# EAGLE board mainboard_transmitter.vf0.1 (EAGLE 7.1.0)
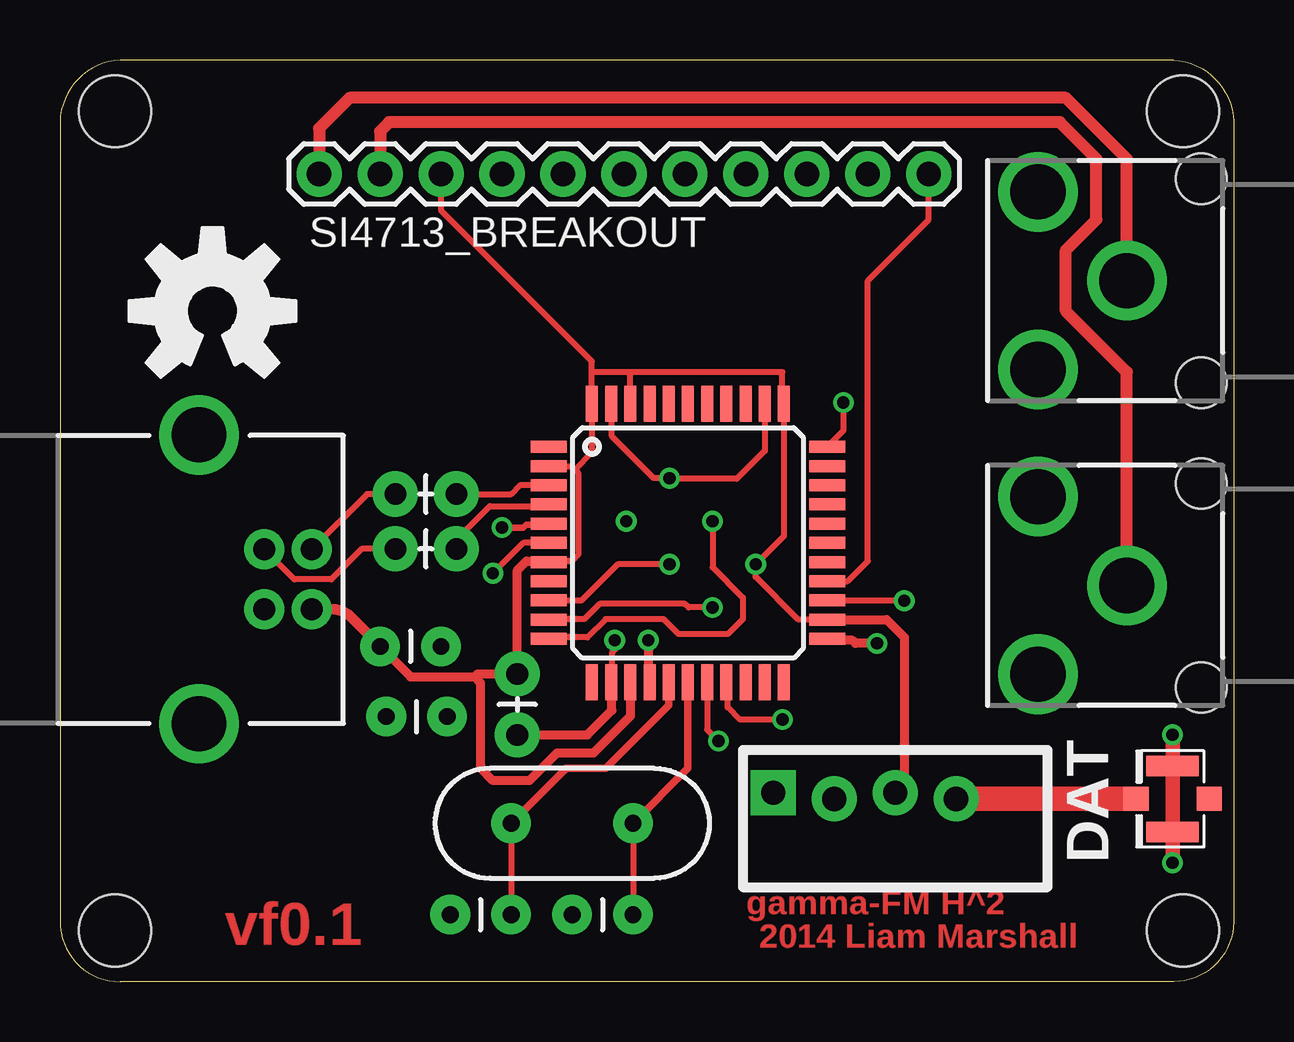
[diagram p0: board, top side]
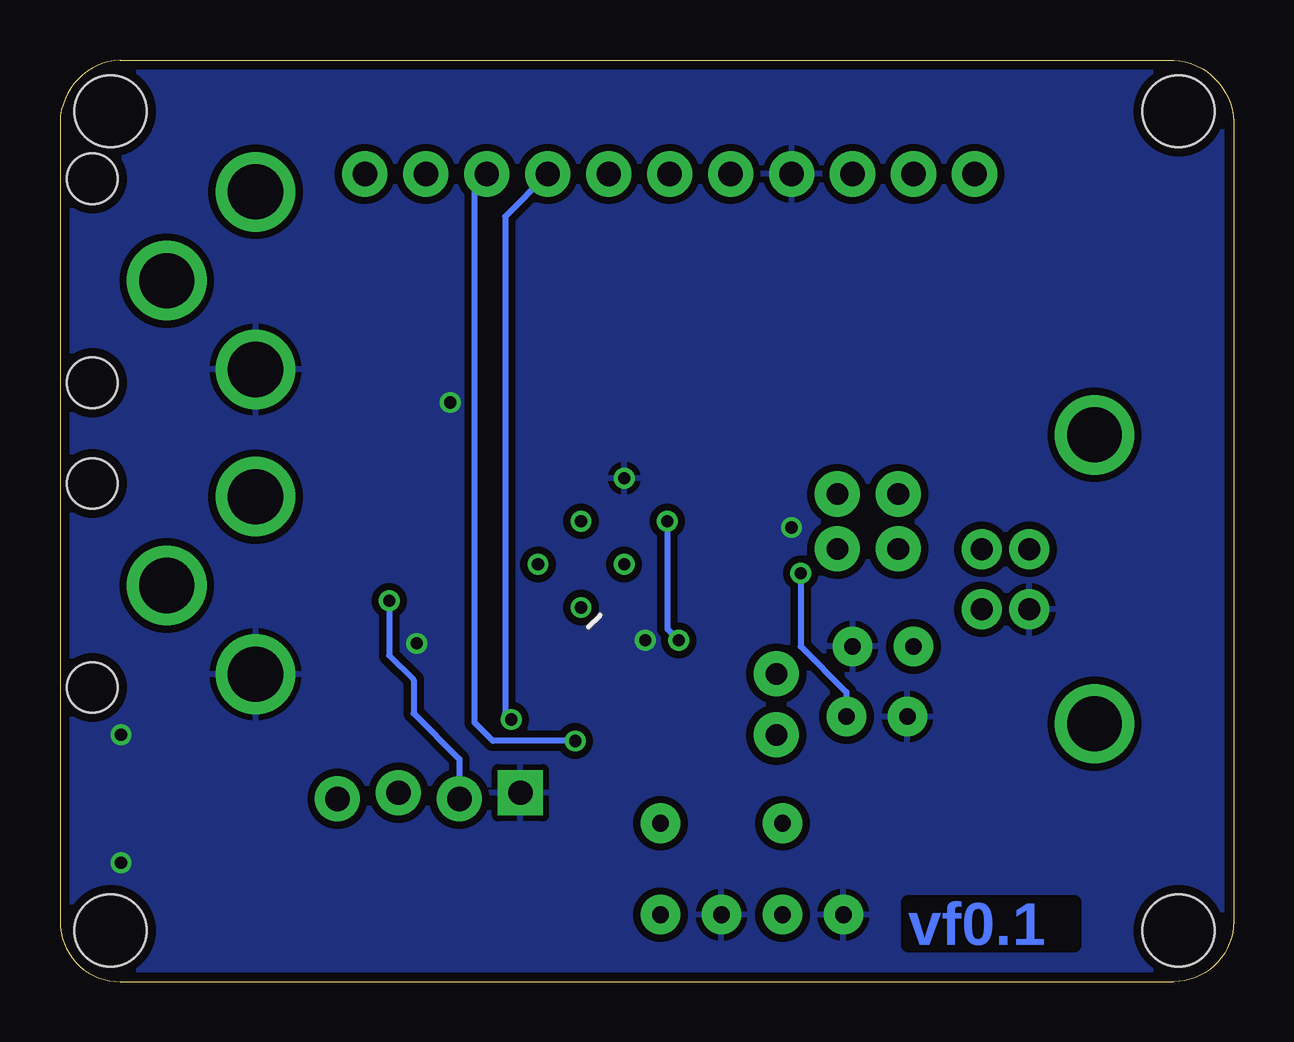
[diagram p1: board, bottom side, seen from below]

Size 48.9 x 38.4 mm. Coordinates in mm from the lower left corner, seen from the top.
Outline: 46.4,38.41 2.5,38.41 arc90 0,35.6 0,2.5 arc90 2.5,0 46.4,0 arc90 48.9,2.5 48.9,35.6 arc90 46.4,38.41
Copper layers (1*16): Top 0.0356mm / dielectric 1.5011mm / Bottom 0.0356mm
Design rules "LaenPCBOrder": minimum track width 6mil, minimum drill 13mil, track to track 6mil, track to pad 6mil, pad to pad 6mil, via to via 6mil, smd to smd 6mil, copper to edge 15mil, drill to drill 6mil, minimum pad ring 7mil, minimum via ring 7mil, stop-mask expansion 3mil, vias tented up to drill 0mil, thermal gap 10mil
Holes 3 mm at 2.29,2.13 46.79,2.13 46.79,36.27 2.29,36.27

## Footprints (pad centres in the part's own frame; a part is rotated, then mirrored left to right if it is on the bottom)
CAP-PTH-SMALL = drill 0.7 pad 1.651: 1 0,0; 2 2.54,0
2X3_TEST_POINTS = drill 0.508: 1 -2.54,-1.27; 2 -2.54,1.27; 3 0,-1.27; 4 0,1.27; 5 2.54,-1.27; 6 2.54,1.27
U.FL = smd 2.2 x 0.85: P$1 0,1.375; P$2 0,-1.375 | smd 1.05 x 1: P$3 1.525,0; P$4 -1.525,0
USB-B-PTH = drill 0.914 pad 1.676: D+ 0,1.25; D- 1.981,1.25; GND 0,-1.25; VBUS 1.981,-1.25 | drill 2.286: S1 -2.718,-6.02; S2 -2.718,6.02
RCA = drill 2.3: PIN 3.7,3.7; SHELL 0,0; SWITCH 3.7,-3.7 | hole 2.1: -3.1,4.25; -3.1,-4.25
AXIAL-0.1 = drill 0.9 pad 1.88: P$1 0,0; P$2 2.54,0
1X11 = drill 1.016 pad 1.88: 1 0,0; 2 2.54,0; 3 5.08,0; 4 7.62,0; 5 10.16,0; 6 12.7,0; 7 15.24,0; 8 17.78,0; 9 20.32,0; 10 22.86,0; 11 25.4,0
TQFP44 = smd 1.5 x 0.5: 1 -5.8,4; 2 -5.8,3.2; 3 -5.8,2.4; 4 -5.8,1.6; 5 -5.8,0.8; 6 -5.8,0; 7 -5.8,-0.8; 8 -5.8,-1.6; 9 -5.8,-2.4; 10 -5.8,-3.2; 11 -5.8,-4; 23 5.8,-4; 24 5.8,-3.2; 25 5.8,-2.4; 26 5.8,-1.6; 27 5.8,-0.8; 28 5.8,0; 29 5.8,0.8; 30 5.8,1.6; 31 5.8,2.4; 32 5.8,3.2; 33 5.8,4 | smd 0.5 x 1.5: 12 -4,-5.8; 13 -3.2,-5.8; 14 -2.4,-5.8; 15 -1.6,-5.8; 16 -0.8,-5.8; 17 0,-5.8; 18 0.8,-5.8; 19 1.6,-5.8; 20 2.4,-5.8; 21 3.2,-5.8; 22 4,-5.8; 34 4,5.8; 35 3.2,5.8; 36 2.4,5.8; 37 1.6,5.8; 38 0.8,5.8; 39 0,5.8; 40 -0.8,5.8; 41 -1.6,5.8; 42 -2.4,5.8; 43 -3.2,5.8; 44 -4,5.8
RF-LINK_TX = drill 1.016 pad 1.88: ANT 7.62,-0.127; DATA 2.54,-0.127; VCC 5.08,0.127 | drill 1.016 pad 1.88 square: GND 0,0.127
HC49US = drill 0.7 pad 1.651: 1 -2.54,0; 2 2.54,0

## Placement (x,y rotation side)
C1  1uF  [CAP-PTH-SMALL]  16.13,11.05 180 top
C2  22pF  [CAP-PTH-SMALL]  21.34,2.79 0 top
C3  22pF  [CAP-PTH-SMALL]  16.26,2.79 0 top
C4  1uF  [CAP-PTH-SMALL]  13.34,13.97 0 top
J1  AVR_SPI_PRG_6TESTPOINTS  [2X3_TEST_POINTS]  26.29,18.29 45 bottom
J2  U.FL  [U.FL]  46.36,7.62 180 top
JP1  USB-B  [USB-B-PTH]  8.51,16.76 0 top
L  RCA  [RCA]  44.45,16.51 180 top
R  RCA  [RCA]  44.45,29.21 180 top
R1  22  [AXIAL-0.1]  13.97,20.32 0 top
R2  22  [AXIAL-0.1]  13.97,18.03 0 top
R3  10k  [AXIAL-0.1]  19.05,10.29 90 top
SI4713_BREAKOUT  M11PTH  [1X11]  10.8,33.66 0 top
U$1  ATMEGA32U4TQFP-44  [TQFP44]  26.16,18.29 0 top
U$2  RF-LINK_TX  [RF-LINK_TX]  29.72,7.75 0 top
U$3  [OSHW-LOGO-L]  6.35,27.94 0 top
Y1  16MHz  [HC49US]  21.34,6.6 0 top

## Library data of the parts
C1-C4 = SparkFun-Capacitors
J1 L R SI4713_BREAKOUT = SparkFun-Connectors
J2 = SparkFun-Connectors; PROD_ID: CONN-09193
JP1 = SparkFun-Connectors; PROD_ID: CONN-08278
R1 R2 = SparkFun-Resistors
R3 = SparkFun-Resistors; PROD_ID: RES-9435
U$1 = SparkFun-DigitalIC
U$2 = SparkFun-RF
U$3 = SparkFun-Aesthetics
Y1 = SparkFun-FreqCtrl

## Nets
!RESET: J1.5 R3.P$1 U$1.13
GND: C1.2 C2.1 C3.1 C4.2 J1.6 J2.P$1 J2.P$2 JP1.GND L.PIN R.PIN SI4713_BREAKOUT.4 U$1.5 U$1.15 U$1.23 U$1.33 U$1.35 U$1.43 U$2.GND
L: L.SHELL SI4713_BREAKOUT.2
MISO: J1.1 U$1.10
MOSI: J1.4 U$1.11
N$1: JP1.D+ R2.P$1
N$2: JP1.D- R1.P$1
N$3: R1.P$2 U$1.3
N$4: R2.P$2 U$1.4
N$5: C1.1 U$1.6
N$6: C2.2 U$1.17 Y1.2
N$7: C3.2 U$1.16 Y1.1
N$9: J2.P$3 U$2.ANT
R: R.SHELL SI4713_BREAKOUT.1
RADIODAT: U$1.25 U$2.DATA
SCK: J1.3 U$1.9
SCL: SI4713_BREAKOUT.9 U$1.18
SDA: SI4713_BREAKOUT.8 U$1.19
T_RST: SI4713_BREAKOUT.11 U$1.26
VCC: C4.1 J1.2 JP1.VBUS R3.P$2 SI4713_BREAKOUT.3 U$1.2 U$1.7 U$1.14 U$1.24 U$1.34 U$1.42 U$1.44 U$2.VCC

## Tracks (layer width: path | path; a pad name or v marks a point on that pad's centre or on a via)
!RESET  (via drill 0.51)
  Top 0.254: v23.12,14.22 23.12,13.84 22.99,13.72 22.99,12.51 U$1.13
  Top 0.381: R3.P$1 21.97,10.29 22.99,11.3 22.99,12.46 U$1.13
  Bottom 0.254: J1.5 23.6,14.71 v23.12,14.22
GND  (via drill 0.51)
  Top 0.254: U$1.43 22.99,24.06 22.99,22.73 24.74,20.98 J1.6 25.42,20.95 28.2,20.95 29.36,22.12 U$1.35 | v32.64,24.13 32.64,22.96 U$1.33
  Top 0.279: v18.42,18.92 19.31,18.92 19.43,19.05 20.4,19.05
  Top 0.381: v34.04,14.1 33.15,14.1 33.02,14.22 32.03,14.22 U$1.23 | v24.51,14.22 24.51,12.54 U$1.15 | 20.4,19.05 U$1.5
  Top 0.61: v46.36,4.95 J2.P$1 J2.P$2 v46.36,10.29
  pour Bottom (isolate 0.305): 58.42,-2.54 -7.62,-2.54 -7.62,40.64 58.42,40.64
L
  Top 0.508: L.SHELL 44.45,25.4 41.91,27.94 41.91,30.48 43.18,31.75 43.18,34.29 41.66,35.81 13.72,35.81 13.34,35.43 SI4713_BREAKOUT.2
MISO
  Top 0.254: J1.1 26.19,15.59 26.04,15.75 22.48,15.75 21.85,15.11 20.39,15.11 U$1.10
MOSI
  Top 0.254: J1.4 27.19,17.26 28.45,16 28.45,15.11 27.82,14.48 25.78,14.48 25.15,15.11 22.74,15.11 21.97,14.35 20.43,14.35 U$1.11
N$1
  Top 0.254: R2.P$1 12.58,18.03 11.31,16.76 9.76,16.76 JP1.D+
N$2
  Top 0.254: R1.P$1 12.8,20.32 JP1.D-
N$3
  Top 0.254: R1.P$2 18.8,20.32 19.18,20.7 20.35,20.7 U$1.3
N$4
  Top 0.254: R2.P$2 16.51,18.41 17.91,19.81 20.29,19.81 U$1.4
N$5  (via drill 0.51)
  Top 0.254: U$1.6 19.31,18.29 v18.04,17.02
  Bottom 0.254: v18.04,17.02 18.04,13.97 16.13,12.06 C1.1
N$6
  Top 0.254: Y1.2 C2.2
  Top 0.305: U$1.17 26.16,8.89 Y1.2
N$7
  Top 0.254: Y1.1 C3.2
  Top 0.305: U$1.16 25.36,11.52 22.74,8.89 21.08,8.89 Y1.1
N$9
  Top 1.016: J2.P$3 U$2.ANT
R
  Top 0.508: R.SHELL 44.45,34.29 41.91,36.83 12.07,36.83 10.8,35.56 SI4713_BREAKOUT.1
RADIODAT  (via drill 0.51)
  Top 0.254: U$1.25 35.17,15.89 v35.18,15.88
  Bottom 0.254: v35.18,15.88 35.18,13.59 34.17,12.57 34.17,11.18 32.26,9.27 U$2.DATA
SCK
  Top 0.254: J1.3 23.23,17.39 21.72,15.88 20.38,15.88 U$1.9
SCL  (via drill 0.51)
  Top 0.254: U$1.18 26.96,10.5 v27.43,10.03
  Bottom 0.254: v27.43,10.03 30.86,10.03 31.63,10.79 31.63,33.15 SI4713_BREAKOUT.9
SDA  (via drill 0.51)
  Top 0.254: v30.1,10.92 28.32,10.92 27.82,11.43 27.82,12.44 U$1.19
  Bottom 0.254: SI4713_BREAKOUT.8 30.36,31.88 30.36,11.18 v30.1,10.92
T_RST
  Top 0.254: U$1.26 32.82,16.69 33.66,17.53 33.66,29.21 36.2,31.75 SI4713_BREAKOUT.11
VCC
  Top 0.254: U$1.24 31.94,15.11 30.74,15.11 28.99,16.86 J1.2 30.16,18.57 U$1.34 30.1,24.09 30.1,25.4 23.76,25.4 | U$1.2 21.31,21.49 21.47,21.34 | 21.47,21.34 21.59,21.21 21.59,17.78 21.34,17.53 20.4,17.53 U$1.7 | 21.47,21.34 22.16,22.04 U$1.44 22.16,25.4 | 22.16,25.4 22.16,25.84 15.88,32.13 SI4713_BREAKOUT.3 | U$1.42 23.76,25.4 | 23.76,25.4 22.16,25.4
  Top 0.381: C4.1 14.61,12.7 17.27,12.7 | 17.27,12.7 17.4,12.83 R3.P$2 19.05,17.14 19.43,17.53 20.33,17.53 U$1.7 | U$1.14 23.76,11.06 22.23,9.53 20.7,9.53 19.56,8.38 18.04,8.38 17.53,8.89 17.53,12.45 17.27,12.7 | U$1.24 34.44,15.09 35.18,14.35 35.18,8.26 U$2.VCC
  Top 0.432: JP1.VBUS 11.38,15.51 arc-45 12.09,15.22 C4.1

## Text on the board
Top: gamma-FM H^2 | vf0.1 | 2014 Liam Marshall
Bottom: vf0.1
tPlace: DAT
tStop: gamma-FM H^2 | vf0.1 | 2014 Liam Marshall
bStop: vf0.1